# Altium PCB sensorbox_kbd.PcbDoc
Units mil, origin at the board's own origin, x right, y up, seen from the top; angles counter-clockwise.
Board outline 1574.8 x 1811.02 mil, 2 copper layers (Top Layer, Bottom Layer); 21 components, 10 nets, 86 pads, 47 vias.
Unrouted connection lines stored in the file: 32.
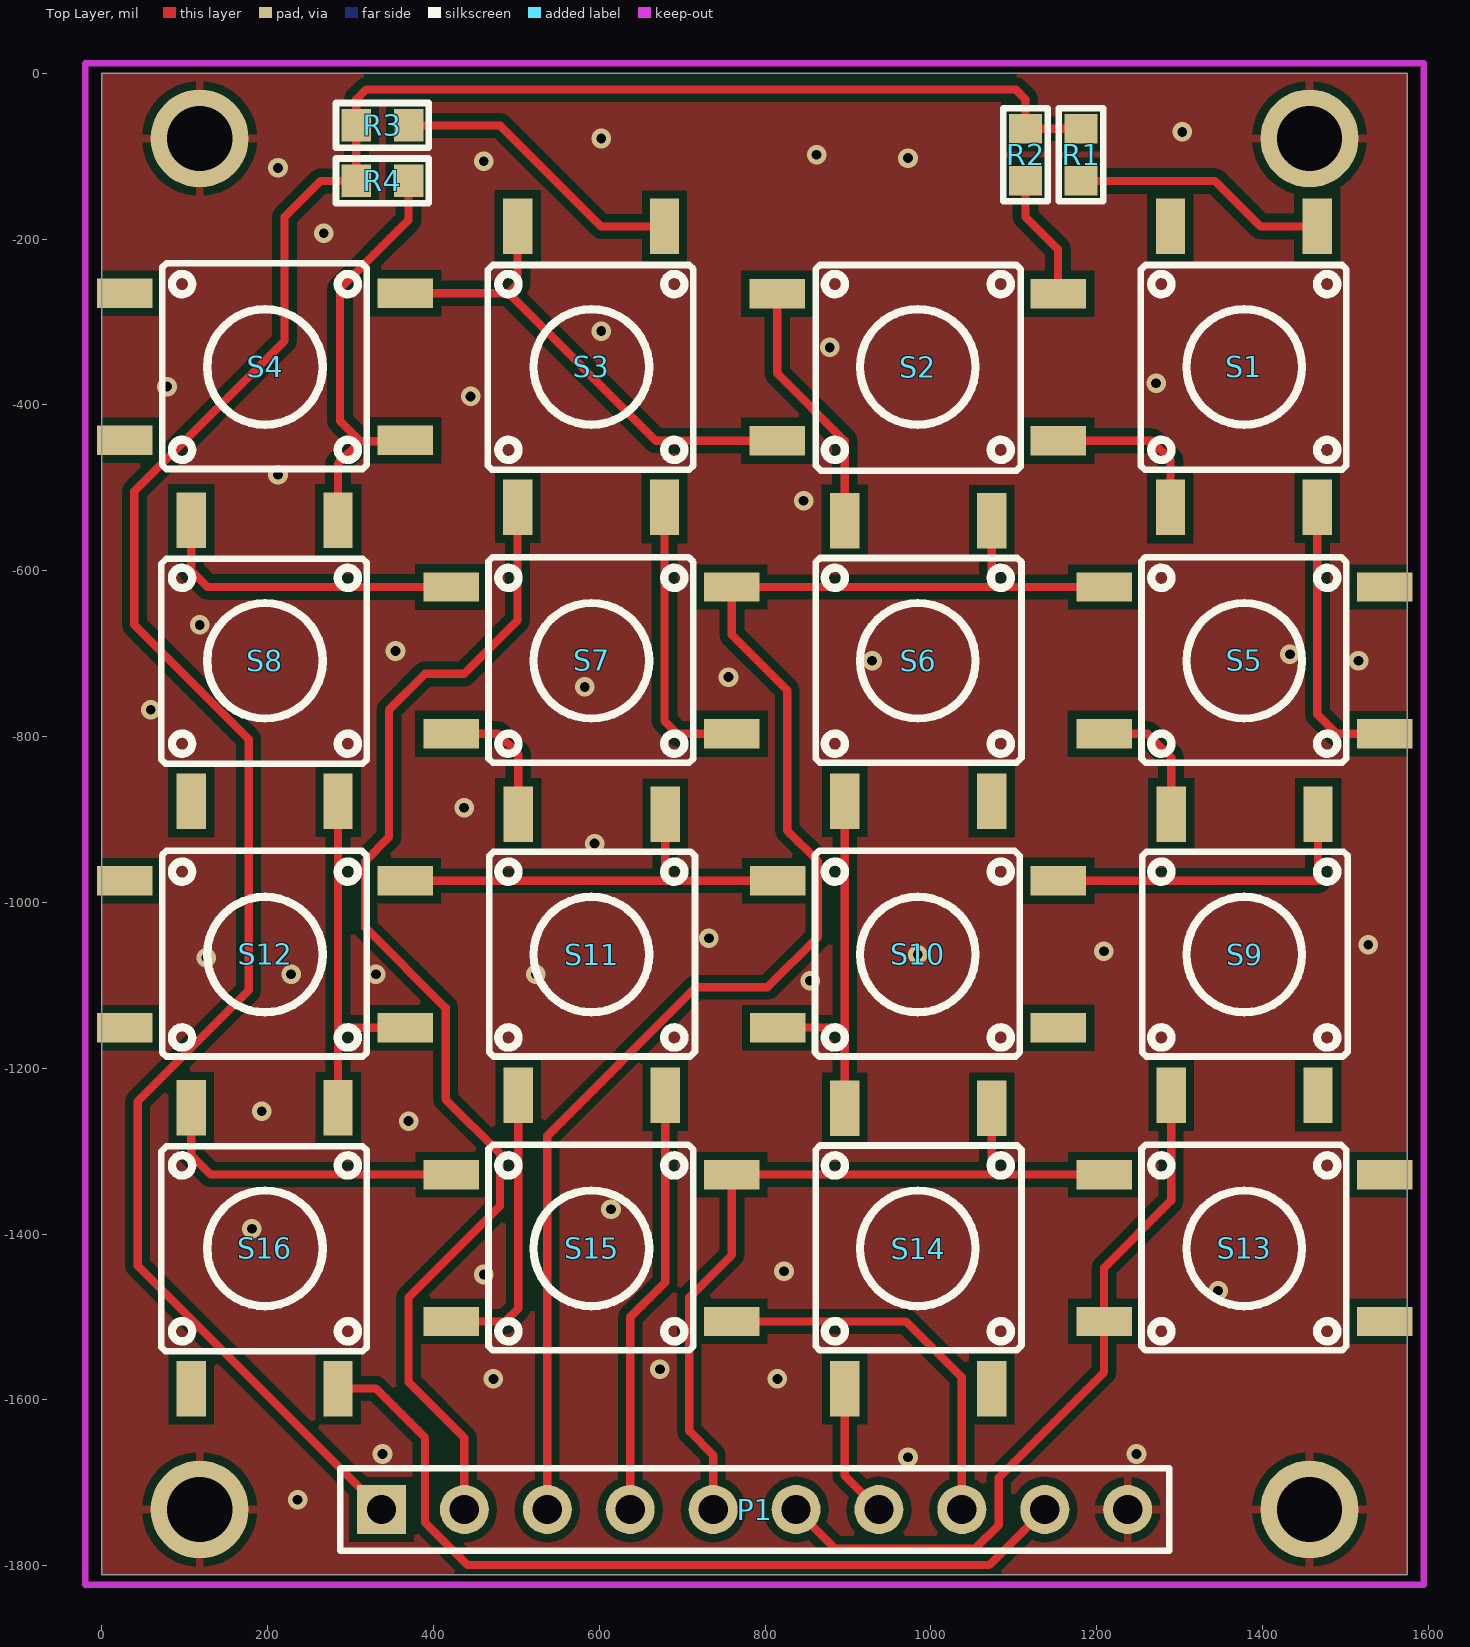
[diagram p0: Top Layer view]
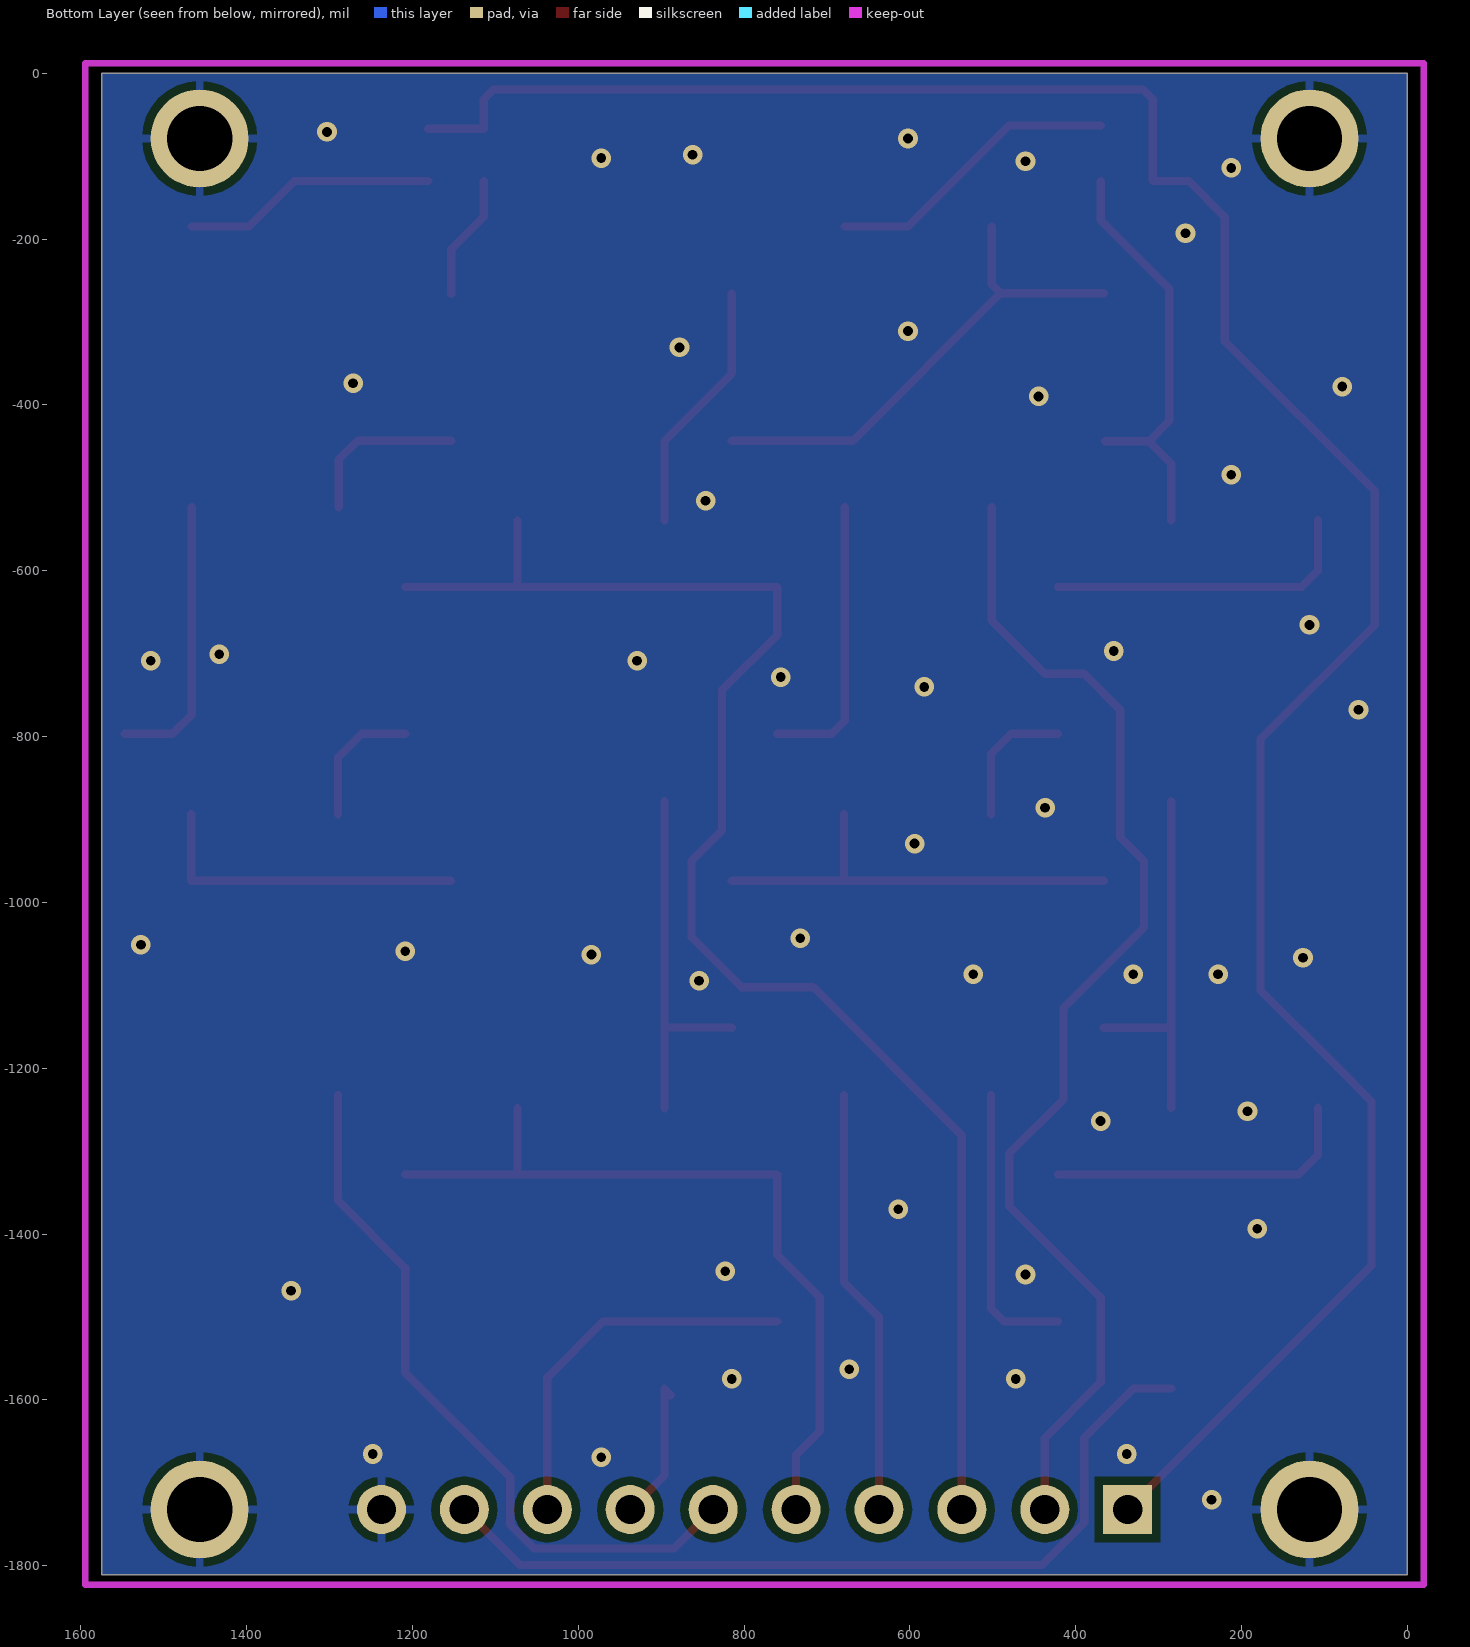
[diagram p1: Bottom Layer view, seen from below]
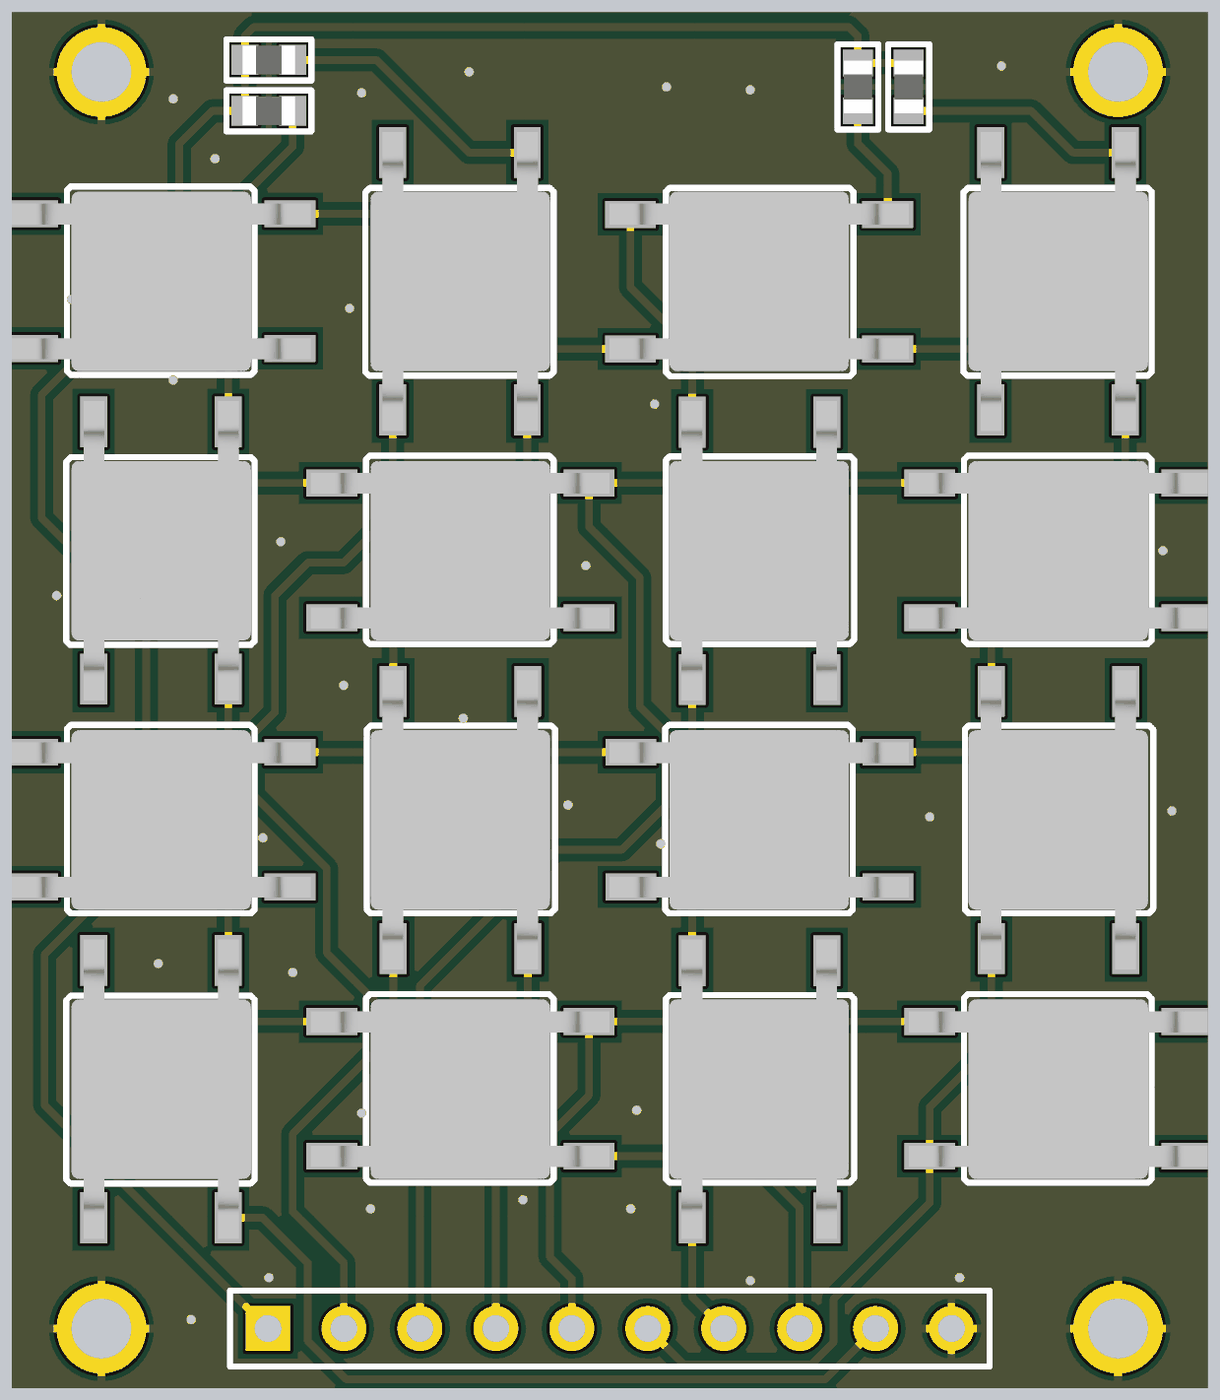
[diagram p2: 3D render of the assembled board from above, using the file's embedded part models]

## Layer stack, top to bottom
Top Layer: signal copper 1.4
Dielectric: dielectric 12.6, FR-4, Dk 4.8
Bottom Layer: signal copper 1.4

## Board outline
0,-1811.02 0,0 1574.8,0 1574.8,-1811.02

## Design rules (kind name [scope] priority, off if disabled: settings)
Clearance [All] p1: gap=10
PolygonConnect [All] p1: connectstyle=Relief reliefconductorwidth=10 reliefentries=4 polygonreliefangle="90 Angle"
RoutingVias [All] p1: holewidth=28 width=50 viastyle="Through Hole" minholewidth=28 minwidth=50 maxholewidth=28 maxwidth=50
SilkscreenOverComponentPads [All] p1: minsilkscreentomaskgap=10
SolderMaskExpansion [All] p1: expansion=4
Width [All] p1: maxlimit=10 minlimit=10 preferedwidth=10
27 further rules are at their usual default settings.

## Components (designator, comment, footprint, x,y, rotation, side; value= is the part's Value field where it differs from the comment)
P1 "Header 10" HDR1X10 337.4,-1732.28 r0 top
R1 "100k" 0603R 1181.1,-98.43 r90 top
R2 "100k" 0603R 1114.17,-98.43 r90 top
R3 "100k" 0603R 338.58,-62.99 r180 top
R4 "100k" 0603R 338.58,-129.92 r180 top
S1 "TACTD60H50I160" TACTD60H50I160 1377.95,-354.33 r90 top
S2 "TACTD60H50I160" TACTD60H50I160 984.25,-354.33 r180 top
S3 "TACTD60H50I160" TACTD60H50I160 590.55,-354.33 r90 top
S4 "TACTD60H50I160" TACTD60H50I160 196.85,-354.33 r0 top
S5 "TACTD60H50I160" TACTD60H50I160 1377.95,-708.66 r0 top
S6 "TACTD60H50I160" TACTD60H50I160 984.25,-708.66 r270 top
S7 "TACTD60H50I160" TACTD60H50I160 590.55,-708.66 r0 top
S8 "TACTD60H50I160" TACTD60H50I160 196.85,-708.66 r90 top
S9 "TACTD60H50I160" TACTD60H50I160 1377.95,-1062.99 r270 top
S10 "TACTD60H50I160" TACTD60H50I160 984.25,-1062.99 r0 top
S11 "TACTD60H50I160" TACTD60H50I160 590.55,-1062.99 r270 top
S12 "TACTD60H50I160" TACTD60H50I160 196.85,-1062.99 r0 top
S13 "TACTD60H50I160" TACTD60H50I160 1377.95,-1417.32 r0 top
S14 "TACTD60H50I160" TACTD60H50I160 984.25,-1417.32 r270 top
S15 "TACTD60H50I160" TACTD60H50I160 590.55,-1417.32 r0 top
S16 "TACTD60H50I160" TACTD60H50I160 196.85,-1417.32 r90 top

## Footprints (in the part's own frame and the unit in brackets; to place one, negate y for a bottom-side part, rotate by r counter-clockwise, add the part's x,y. Pads: shape width x height; smd on the part's side, far side on the other; paste and mask are expansions set on the pad)
0603R [mm]
  rect 0.9x1 smd: 1(-0.8,0) 2(0.8,0)
  silkscreen extent -1.42,-0.69 1.42,0.69, body extent -0.87,-0.47 0.88,0.48, height 0.55
HDR1X10 [mm] "Connector; Header; 10 Position"
  rect 1.5x1.5 hole 0.9: 1(0,0)
  round 1.5 hole 0.9: 2(2.54,0) 3(5.08,0) 4(7.62,0) 5(10.16,0) 6(12.7,0) 7(15.24,0) 8(17.78,0) 9(20.32,0) 10(22.86,0)
  silkscreen extent -1.27,-1.27 24.13,1.27
TACTD60H50I160 [mm] "tact switch SMT (Maritex)"
  rect 1.7x0.9 smd: 1(-4.296,2.261) 1(4.304,2.261) 2(-4.296,-2.239) 2(4.304,-2.239)
  silkscreen extent -3.15,-3.12 3.12,3.18, body extent -5,-3 5,3, height 5.1

## Part data
P1: "Header, 10-Pin"
R1 R2 R3 R4: library part RES_0603, "SMD Resistor"
S1 S2 S3 S4 S5 S6 S7 S8 S9 S10 S11 S12 S13 S14 S15 S16: library part SW-PB_SMD_5mm, "Push button 5mm"

## Free pads (board coordinates)
  round 118.11 hole 78.74: 0(118.11,-1732.28) 1(118.11,-78.74) 2(1456.69,-78.74) 3(1456.69,-1732.28)

## Via types
v1: diameter 23.62, hole 11.81, Top Layer to Bottom Layer, tented both sides, 47 vias

## Nets (pads, with @x,y where several pads share a name; then routed paths per layer and width w, separated by ;. In a path a pad name is that pad's centre, name@x,y a point inside that pad or via, vN(x,y) a via of type N, cw(c..) or ccw(c..) an arc to the next point about the centre after c; other vN are vias at no path point)
3V3: P1.1 R1.2 R2.2 R3.2 R4.2 | length 2990.7
  Top Layer w10: P1.1 43.31,-1438.19 43.31,-1240.01 83.92,-1199.4 84.06,-1199.4 177.17,-1106.3 177.17,-803.15 39.37,-665.35 39.37,-503.94 220.47,-322.83 220.47,-173.23 263.78,-129.92 R4.2 R3.2 307.09,-31.5 318.9,-19.68 1102.36,-19.68 1114.17,-31.5 R2.2 R1.2
GND: P1.10 pad.0 pad.1 pad.2 pad.3
  other v1: 236.22,-1720.47 972.44,-1669.29 338.58,-1665.35 1248.03,-1665.35 472.44,-1574.8 814.96,-1574.8 673.23,-1562.99 1346.46,-1468.5 460.63,-1448.82 822.83,-1444.88 181.1,-1393.7 614.17,-1370.08 370.08,-1263.78 192.91,-1251.97 854.33,-1094.49 228.35,-1086.61 330.71,-1086.61 523.62,-1086.61 125.98,-1066.93 984.25,-1062.99 1208.66,-1059.06 1527.56,-1051.18 732.28,-1043.31 594.49,-929.13 437.01,-885.83 59.06,-767.72 582.68,-740.16 755.91,-728.35 929.13,-708.66 1515.75,-708.66 1433.07,-700.79 354.33,-696.85 118.11,-665.35 846.46,-515.75 212.6,-484.25 444.88,-389.76 78.74,-377.95 1271.65,-374.02 877.95,-330.71 602.36,-311.02 267.72,-192.91 212.6,-114.17 460.63,-106.3 972.44,-102.36 862.2,-98.43 602.36,-78.74 1303.15,-70.87
NetP1_2: P1.2 S1.1 S2.1 S3.1 S4.1 | length 2263
  Top Layer w10: S4.1@366.31,-265.33 490.57,-265.33 ; P1.2 437.4,-1646.06 370.08,-1578.74 370.08,-1476.38 480.32,-1366.14 480.32,-1303.15 414.77,-1237.61 414.77,-1127.23 317.84,-1030.3 317.84,-950.06 346.46,-921.45 346.46,-767.72 389.76,-724.41 437.01,-724.41 501.55,-659.87 S3.1@501.55,-523.46 ; S3.1@501.55,-184.87 501.55,-254.35 490.57,-265.33 ; S2.1@814.8,-443.33 668.57,-443.33 490.57,-265.33 ; S2.1@1153.38,-443.33 1266.17,-443.33 1288.95,-466.12 S1.1@1288.95,-523.46
NetP1_3: P1.3 S5.1 S6.1 S7.1 S8.1 | length 2252.8
  Top Layer w10: S8.1@107.85,-539.2 107.85,-599.98 127.54,-619.66 S7.1@421.43,-619.66 ; P1.3 537.4,-1281.5 716.54,-1102.36 803.15,-1102.36 863.59,-1041.92 863.59,-950.06 826.77,-913.24 826.77,-744.09 760.01,-677.33 760.01,-619.66 1073.25,-619.66 ; S6.1@1073.25,-539.54 1073.25,-619.66 ; S5.1@1208.83,-619.66 1073.25,-619.66
NetP1_4: P1.4 S9.1 S10.1 S11.1 S12.1 | length 1440.3
  Top Layer w10: S12.1@366.31,-973.99 679.55,-973.99 679.55,-972.44 ; P1.4 637.4,-1500.39 679.55,-1458.24 S11.1@679.55,-1232.45 ; S11.1@679.55,-893.87 679.55,-972.44 ; S10.1@815.13,-973.99 681.1,-973.99 679.55,-972.44 ; S10.1@1153.71,-973.99 1466.95,-973.99 S9.1@1466.95,-893.87
NetP1_5: P1.5 S13.1 S14.1 S15.1 S16.1 | length 1346.3
  Top Layer w10: S16.1@107.85,-1247.87 107.85,-1304.7 131.47,-1328.32 S15.1@421.43,-1328.32 ; P1.5 737.4,-1666.54 708.66,-1637.8 708.66,-1476.38 760.01,-1425.03 760.01,-1328.32 1073.25,-1328.32 ; S14.1@1073.25,-1248.2 1073.25,-1328.32 ; S13.1@1208.83,-1328.32 1073.25,-1328.32
NetP1_6: P1.6 R1.1 S1.2 S5.2 S9.2 S13.2 | length 1690.1
  Top Layer w10: P1.6 884.33,-1779.21 1053.44,-1779.21 1081.93,-1750.73 1081.93,-1693.66 1208.83,-1566.76 1208.83,-1505.49 1208.83,-1440.78 1289.79,-1359.82 S9.2@1289.79,-1232.45 ; R1.1 1342.52,-129.92 1397.47,-184.87 S1.2@1466.12,-184.87 ; S5.2@1208.83,-796.83 1261.39,-796.83 1289.79,-825.22 S9.2@1289.79,-893.87 ; S1.2@1466.12,-523.46 1466.12,-773.2 1489.74,-796.83 S5.2@1547.41,-796.83
NetP1_7: P1.7 R2.1 S2.2 S6.2 S10.2 S14.2 | length 1084.5
  Top Layer w10: S2.2@814.8,-266.17 814.8,-362.04 896.09,-443.33 S6.2@896.09,-539.54 ; S10.2@815.13,-1151.16 814.96,-1150.99 896.09,-1150.99 ; S14.2@888.38,-1594.49 896.09,-1586.78 896.09,-1690.97 P1.7 ; S14.2@896.09,-1248.2 896.09,-1150.99 ; S6.2@896.09,-878.12 896.09,-1150.99 ; R2.1 1114.17,-173.23 1153.38,-212.43 S2.2@1153.38,-266.17
NetP1_8: P1.8 R3.1 S3.2 S7.2 S11.2 S15.2 | length 1677.7
  Top Layer w10: R3.1 480.31,-62.99 602.2,-184.87 S3.2@678.72,-184.87 ; S15.2@421.43,-1505.49 486.64,-1505.49 502.39,-1489.74 S11.2@502.39,-1232.45 ; S7.2@421.43,-796.83 477.93,-796.83 502.39,-821.28 S11.2@502.39,-893.87 ; S3.2@678.72,-523.46 678.72,-781.08 694.46,-796.83 S7.2@760.01,-796.83 ; S15.2@760.01,-1505.49 970.06,-1505.49 1037.4,-1572.83 P1.8
NetP1_9: P1.9 R4.1 S4.2 S8.2 S12.2 S16.2 | length 1995.7
  Top Layer w10: S16.2@285.02,-1586.45 330.54,-1586.45 389.76,-1645.67 389.76,-1748.03 440.94,-1799.21 1070.47,-1799.21 P1.9 ; S16.2@285.02,-1247.87 S8.2@285.02,-877.79 ; S8.2@285.02,-539.2 285.02,-470.89 311.86,-444.05 ; 286.57,-1151.16 S12.2@366.31,-1151.16 ; S4.2@364.76,-444.05 311.86,-444.05 ; R4.1 370.08,-177.17 287.4,-259.84 287.4,-419.59 311.86,-444.05

## Polygon pours and split planes (outlines as drawn)
GND on Bottom Layer "Bottom Layer-GND" (solid, pour order 6): 0,-1811.02 0,0 1574.8,0 1574.8,-1811.02
GND on Top Layer "Top Layer-GND" (solid, pour order 4): 0,-1811.02 0,0 1574.8,0 1574.8,-1811.02

## Keep-outs
Keep-Out Layer:
  lines w8: -19.68,-1822.83 -19.68,11.81 1594.49,11.81 1594.49,-1822.83 -19.68,-1822.83

## Silkscreen, mask and mechanical layers (free items; w line width, h text height)
Mechanical 1:
  lines w7.87: -19.68,-1822.83 1594.49,-1822.83 1594.49,11.81 -19.68,11.81 -19.68,-1822.83